# EAGLE board battery_board (EAGLE 6.4)
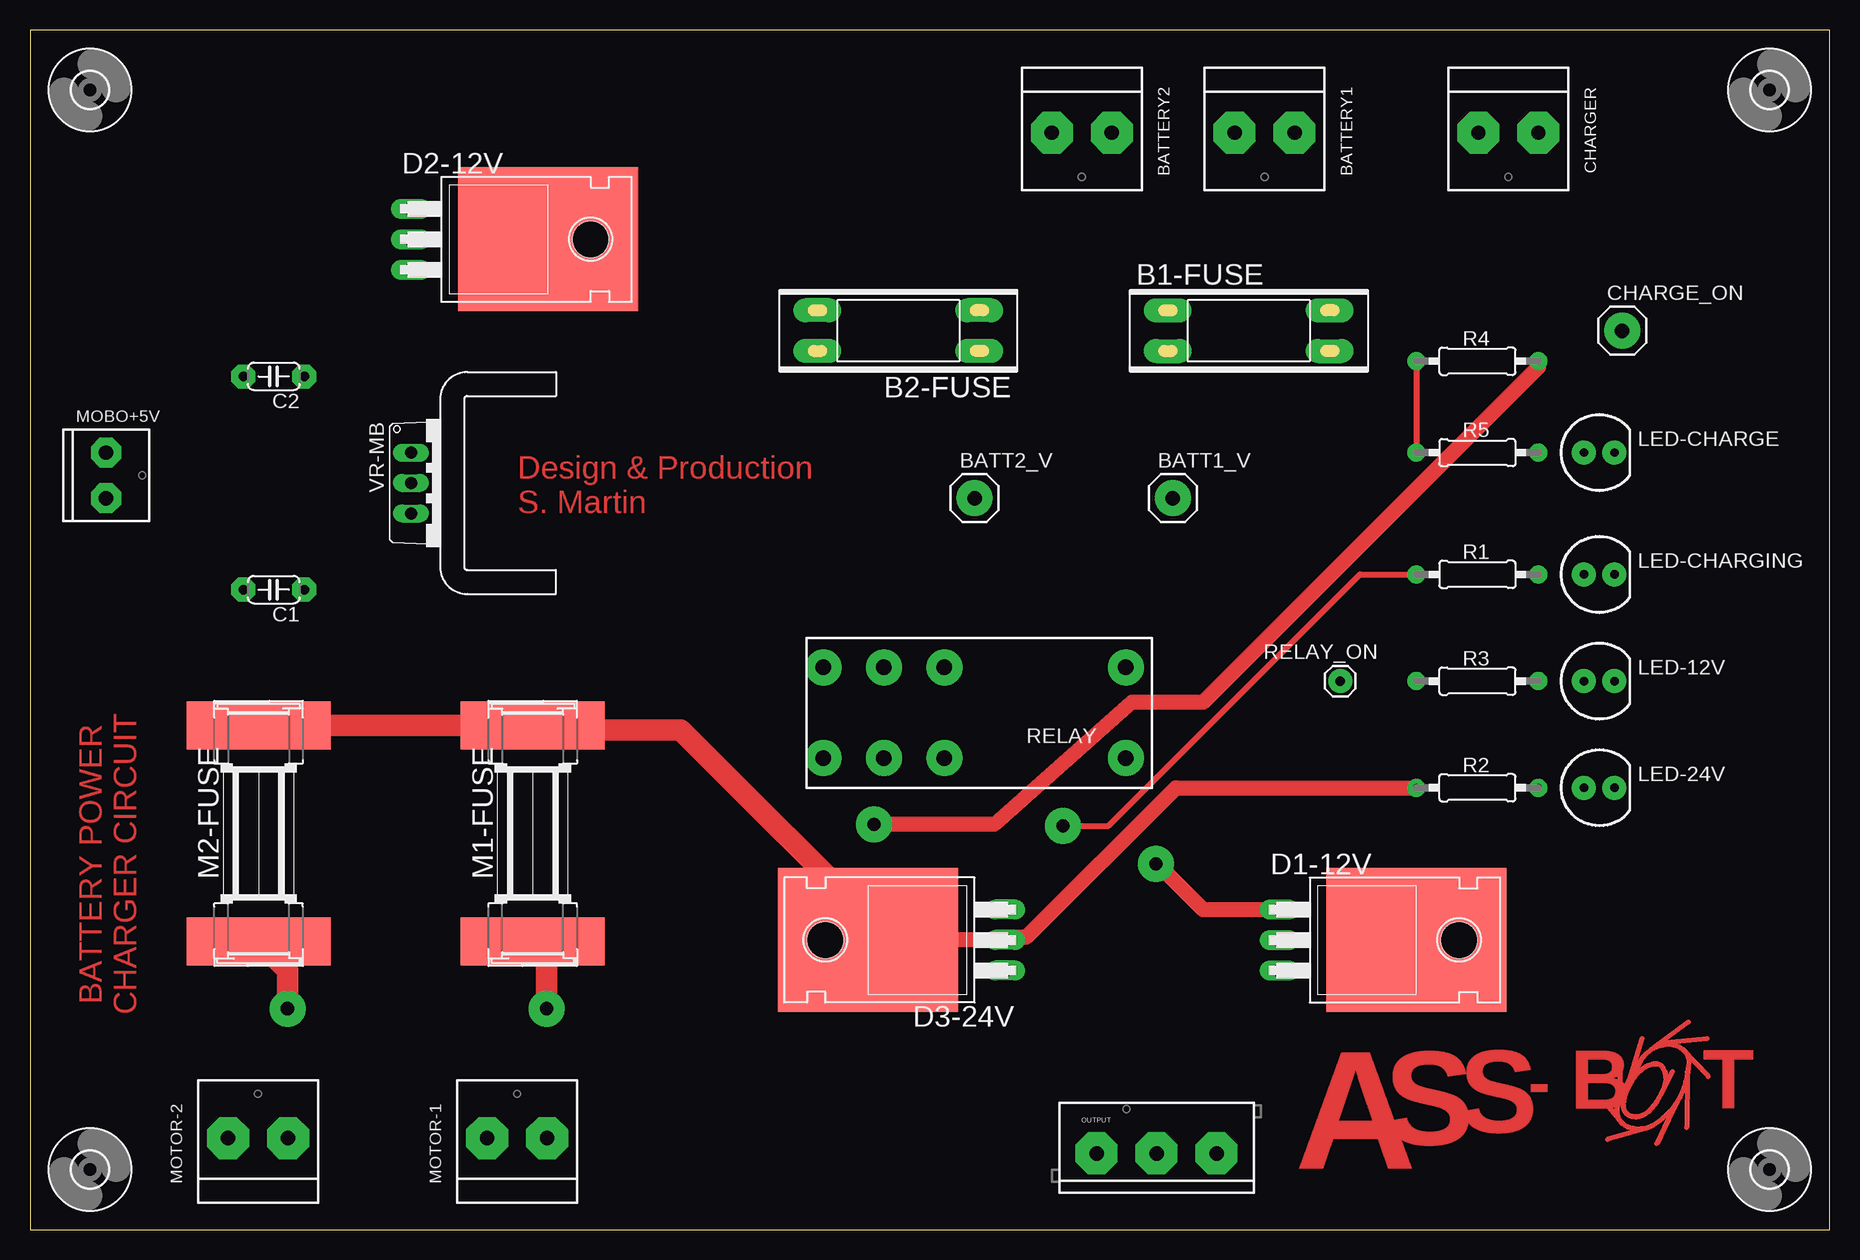
[diagram p0: board, top side]
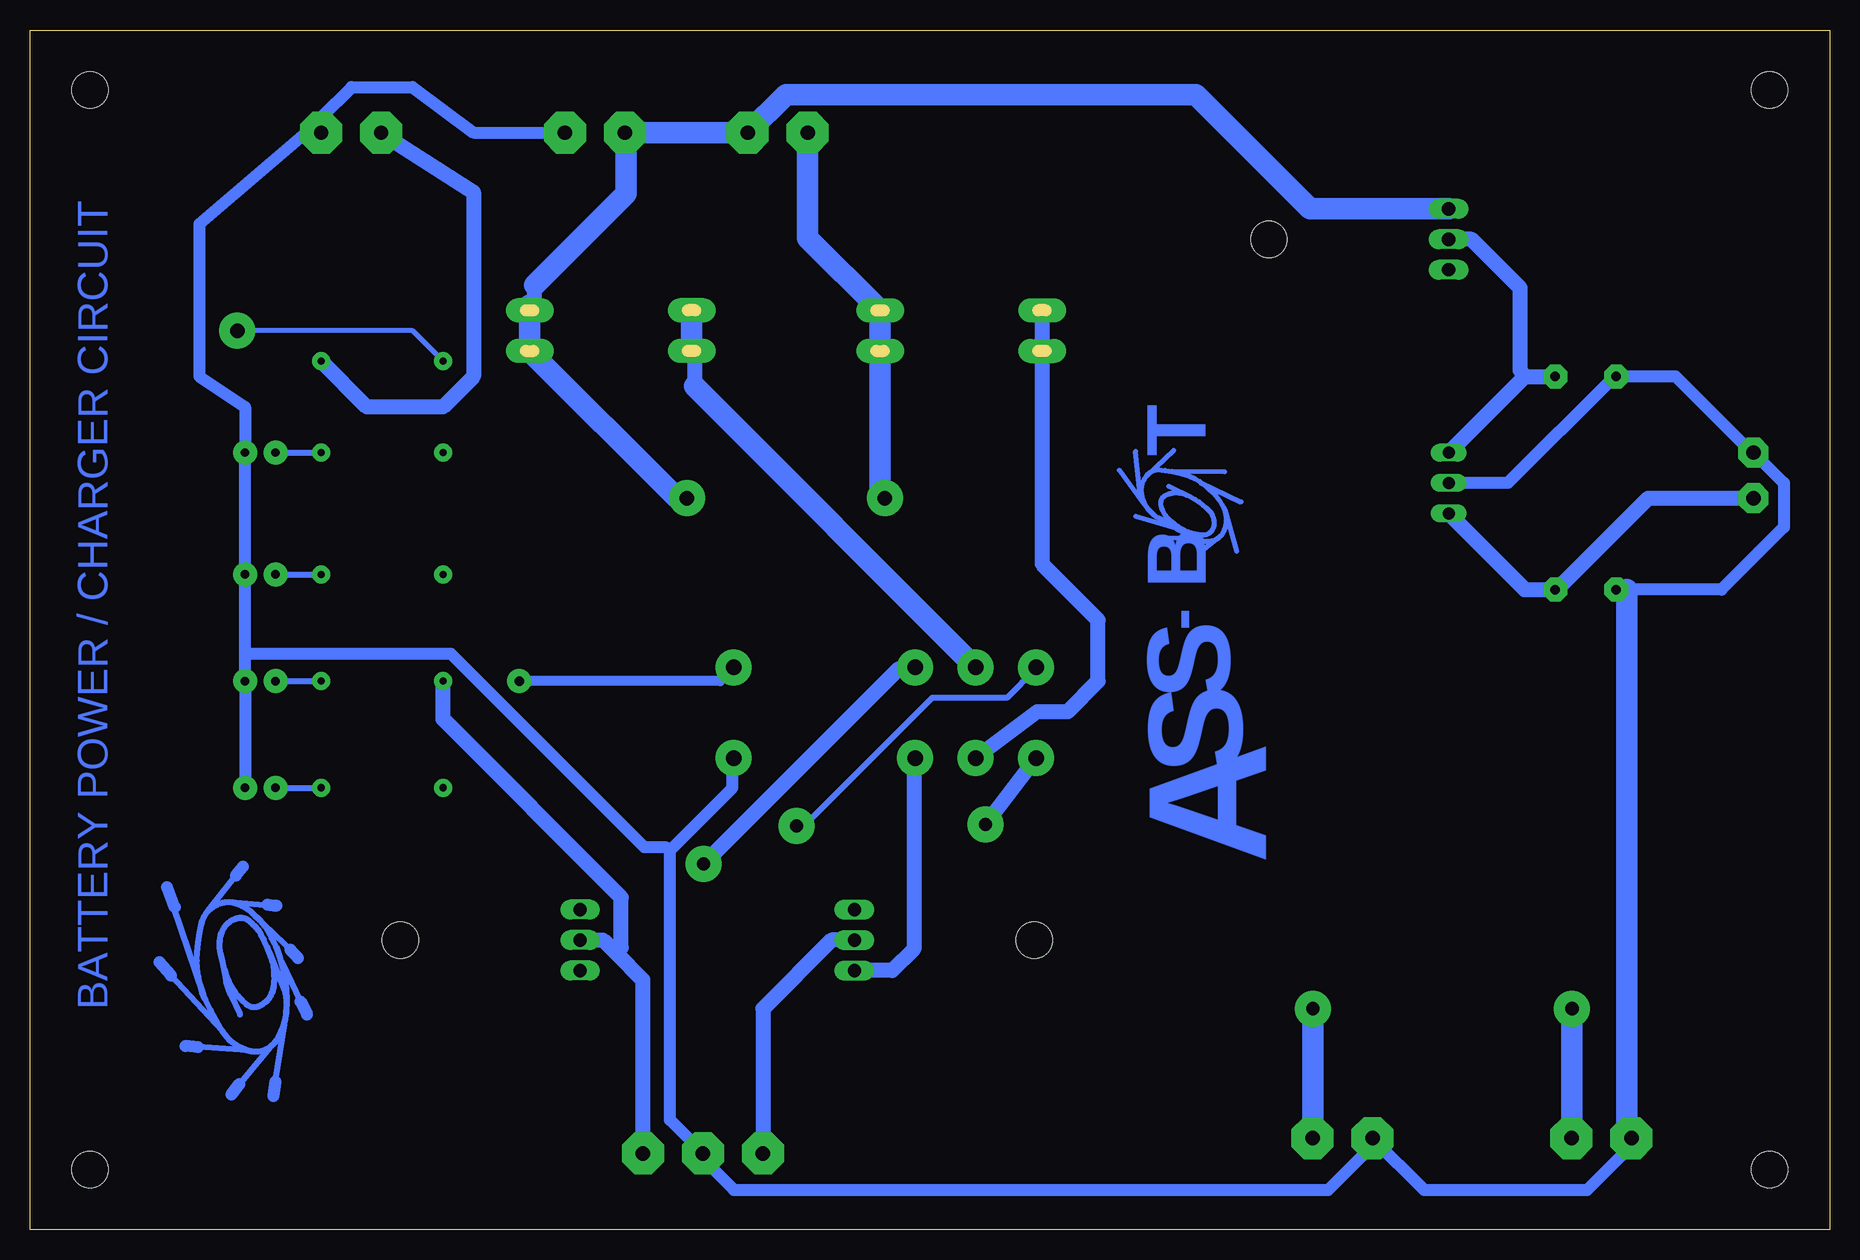
[diagram p1: board, bottom side, seen from below]

Size 150 x 100 mm. Coordinates in mm from the lower left corner, seen from the top.
Outline: 0,0 150,0 150,100 0,100 0,0
Copper layers (1*16): Top 0.035mm / dielectric 1.5mm / Bottom 0.035mm
Design rules "default *": minimum track width 20mil, minimum drill 0.8mm, track to track 20mil, track to pad 20mil, pad to pad 30mil, via to via 30mil, smd to smd 8mil, copper to edge 40mil, drill to drill 8mil, minimum pad ring 10mil, minimum via ring 20mil, stop-mask expansion 4mil, vias tented up to drill 0mil, thermal gap 10mil
Net classes: 1 ground: width 1.016 mm, clearance 0.762 mm; 2 battery: width 1.27 mm, clearance 0.762 mm
tRestrict: area 14.6,5.7 to 23.5,9.5; area 36.2,5.7 to 45.1,9.5; area 87,4.4 to 101,8.3; area 64.8,45.1 to 77.8,48.6; area 64.5,37.5 to 78.1,41; area 89.9,45.1 to 93.3,48.6; area 89.9,37.8 to 93,41; area 107.6,44.1 to 110.8,47.3; area 93.3,59.1 to 97.5,62.5; area 76.5,58.7 to 81,62.9; area 128.3,63.5 to 133.3,66; area 128.3,53.3 to 133.3,55.9; 16 more areas

## Footprints (pad centres in the part's own frame; a part is rotated, then mirrored left to right if it is on the bottom)
FUSE_BLADE = drill 0.8 pad 2 long: @P$1 -6.75,1.7; @P$2 6.75,1.7; P$1 -6.75,-1.7; P$2 6.75,-1.7
1-HOLE_BIG = drill 1.2 pad 3: P$1 0,0
SCREWTERMINAL-5MM-2 = drill 1.2 pad 3.5 octagon: 1 0,0; 2 5,0
C050-024X044 = drill 0.8 pad 2 octagon: 1 -2.54,0; 2 2.54,0
TO22-DIODE-H = drill 1.1 long: @P$1 2.54,-7.62; P$1 -2.54,-7.62; P$2 0,-7.62 | smd 12 x 15: @P$2 0,3.81 | hole 3: 0,7.366
LED5MM = drill 0.7 pad 2: A -1.27,0; K 1.27,0
FUSE-5X20MM_SMD = smd 4 x 12: P$1 -9,0; P$2 9,0
SCREWTERMINAL-3.81MM = drill 1.2 pad 2.5 octagon: 1 0,0; 2 3.81,0
SCREWTERMINAL-5MM-3 = drill 1.2 pad 3.5 octagon: 1 0,0; 2 5,0; 3 10,0
0207/10 = drill 0.6 pad 1.5: 1 -5.08,0; 2 5.08,0
RELAY_RT2 = drill 1.3 pad 3: 11 7.56,-3.68; 12 2.52,-3.68; 14 12.6,-3.68; 21 7.56,3.88; 22 2.52,3.88; 24 12.6,3.88; A1 -12.6,-3.68; A2 -12.6,3.88
1-HOLE = drill 0.8 pad 2: 1 0,0
3,0 = hole 3: 0,0
TO220V-HEATSINK = drill 1 long: 1 -2.54,-2.54; 2 0,-2.54; 3 2.54,-2.54

## Placement (x,y rotation side)
B1-FUSE  20A  [FUSE_BLADE]  101.6,74.93 0 top
B2-FUSE  20A  [FUSE_BLADE]  72.39,74.93 180 top
BATT1_V  1-HOLE  [1-HOLE_BIG]  95.25,60.96 0 top
BATT2_V  1-HOLE  [1-HOLE_BIG]  78.74,60.96 0 top
BATTERY1  12V  [SCREWTERMINAL-5MM-2]  105.41,91.44 180 top
BATTERY2  12V  [SCREWTERMINAL-5MM-2]  90.17,91.44 180 top
C1  10uF  [C050-024X044]  20.32,53.34 180 top
C2  2.2uF  [C050-024X044]  20.32,71.12 180 top
CHARGE_ON  1-HOLE  [1-HOLE_BIG]  132.72,74.93 0 top
CHARGER  24V  [SCREWTERMINAL-5MM-2]  125.73,91.44 180 top
D1-12V  30A  [TO22-DIODE-H]  111.76,24.13 270 top
D2-12V  30A  [TO22-DIODE-H]  39.37,82.55 270 top
D3-24V  30A  [TO22-DIODE-H]  73.66,24.13 90 top
LED-12V  [LED5MM]  130.81,45.72 0 top
LED-24V  [LED5MM]  130.81,36.83 0 top
LED-CHARGE  [LED5MM]  130.81,64.77 0 top
LED-CHARGING  [LED5MM]  130.81,54.61 0 top
M1-FUSE  3A  [FUSE-5X20MM_SMD]  41.91,33.02 90 top
M2-FUSE  3A  [FUSE-5X20MM_SMD]  19.05,33.02 90 top
MOBO+5V  2-HOLESSC3.81MM  [SCREWTERMINAL-3.81MM]  6.35,64.77 270 top
MOTOR-1  2-HOLESSC5MM  [SCREWTERMINAL-5MM-2]  38.1,7.62 0 top
MOTOR-2  2-HOLESSC5MM  [SCREWTERMINAL-5MM-2]  16.51,7.62 0 top
OUTPUT  3-HOLE  [SCREWTERMINAL-5MM-3]  88.9,6.35 0 top
R1  560R  [0207/10]  120.65,54.61 180 top
R2  1k  [0207/10]  120.65,36.83 0 top
R3  560R  [0207/10]  120.65,45.72 0 top
R4  1k  [0207/10]  120.65,72.39 0 top
R5  220R  [0207/10]  120.65,64.77 180 top
RELAY  5V  [RELAY_RT2]  78.74,43.18 180 top
RELAY_ON  1-HOLE"  [1-HOLE]  109.22,45.72 0 top
U$1  [LOGO-ASSBOT]  105.41,5.08 0 top
U$3  [3,0]  5,95 0 top
U$4  [3,0]  145,95 0 top
U$5  [3,0]  145,5 0 top
U$6  [3,0]  5,5 0 top
U$7  [LOGO-ASSBOT]  46.99,30.48 90 bottom
U$8  [LOGO-SYNCHROTRON]  132.08,21.59 270 bottom
U$9  [LOGO-SYNCHROTRON-SILK]  14.61,84.45 0 top
VR-MB  LT323A  [TO220V-HEATSINK]  34.29,62.23 270 top

## Library data of the parts
B1-FUSE B2-FUSE BATT1_V BATT2_V BATTERY1 BATTERY2 C1 C2 CHARGE_ON CHARGER D1-12V D2-12V D3-24V LED-12V LED-24V LED-CHARGE LED-CHARGING M1-FUSE M2-FUSE MOBO+5V MOTOR-1 MOTOR-2 OUTPUT R1-R5 RELAY_ON U$1 U$3-U$9 VR-MB = parts
RELAY = parts; MPN: RT424A05; OC_FARNELL: unknown; OC_NEWARK: 48M7975

## Nets
12V [battery]: D1-12V.P$2 OUTPUT.3 R3.1
24V [battery]: D3-24V.P$2 M1-FUSE.P$2 M2-FUSE.P$2 OUTPUT.1 R2.1
GND [ground]: BATTERY1.1 C1.2 C2.2 CHARGER.1 LED-12V.K LED-24V.K LED-CHARGE.K LED-CHARGING.K MOBO+5V.1 MOTOR-1.1 MOTOR-2.1 OUTPUT.2 RELAY.A2 VR-MB.2
N$1 [battery]: B1-FUSE.P$2 BATT1_V.P$1 BATTERY1.2 BATTERY2.1 D2-12V.P$1
N$2 [battery]: CHARGER.2 R4.2 RELAY.24
N$3: LED-24V.A R2.2
N$4 [battery]: D3-24V.P$1 RELAY.22
N$5 [battery]: B2-FUSE.P$1 BATT2_V.P$1 BATTERY2.2
N$6 [battery]: D1-12V.P$1 RELAY.12
N$7: LED-CHARGING.A R1.1
N$8 [battery]: C1.1 MOBO+5V.2 VR-MB.3
N$9 [battery]: M1-FUSE.P$1 MOTOR-1.2
N$10 [battery]: M2-FUSE.P$1 MOTOR-2.2
N$11: RELAY.A1 RELAY_ON.1
N$12 [battery]: C2.1 D2-12V.P$2 VR-MB.1
N$13: R1.2 RELAY.14
N$14: LED-12V.A R3.2
N$15: CHARGE_ON.P$1 R4.1 R5.2
N$16: LED-CHARGE.A R5.1
N$20 [battery]: B2-FUSE.P$2 RELAY.21
N$39 [battery]: B1-FUSE.P$1 RELAY.11

## Tracks (layer width: path | path; a pad name or v marks a point on that pad's centre or on a via)
12V
  Bottom 1.27: 101.16,23.05 102.23,24.13 D1-12V.P$2 | 101.16,23.05 98.93,20.83 98.93,6.35 OUTPUT.3 | R3.1 115.57,42.55 100.71,27.69 100.71,23.5 101.16,23.05
24V
  Top 1.27: 19.05,42.04 M2-FUSE.P$2 | 41.91,42.04 M1-FUSE.P$2 42.42,41.66 | 71.75,24.13 D3-24V.P$2 81.79,24.38 83.06,24.38 95.5,36.83 R2.1
  Top 1.778: 41.91,42.04 19.05,42.04 | 42.42,41.66 54.23,41.66 71.75,24.13
  Bottom 1.27: OUTPUT.1 88.9,18.41 83.19,24.13 D3-24V.P$2
GND
  Bottom 1.016: C1.2 16.89,53.34 9.02,53.34 3.81,58.55 3.81,62.23 MOBO+5V.1 6.73,65.02 12.83,71.12 C2.2 18.16,70.87 26.8,62.23 VR-MB.2 | 16.89,8 MOTOR-2.1 17.14,6.35 20.19,3.3 33.78,3.3 MOTOR-1.1 38.48,7.37 38.99,6.1 41.78,3.3 91.31,3.3 93.47,5.46 OUTPUT.2 94.23,6.73 96.65,9.14 96.65,31.62 | 96.65,31.62 91.44,36.83 91.44,39.24 RELAY.A2 | LED-24V.K LED-12V.K 132.08,48.01 | 132.08,48.01 LED-CHARGING.K LED-CHARGE.K 132.08,68.58 135.89,71.12 135.89,83.82 127,91.44 CHARGER.1 125.73,92.71 123.19,95.25 118.11,95.25 113.03,91.44 BATTERY1.1 | 132.08,48.01 114.94,48.01 98.81,31.88 97.03,31.88 96.65,31.62
  Bottom 1.778: 16.89,53.34 16.89,8
N$1
  Bottom 1.016: BATT1_V.P$1 96.08,60.96 | 100.33,91.36 BATTERY1.2
  Bottom 1.27: 108.35,77.07 107.95,77.47 107.95,78.74
  Bottom 1.778: D2-12V.P$1 43.31,85.09 52.83,94.61 87,94.61 BATTERY2.1 BATTERY1.2 | 96.08,60.96 B1-FUSE.P$2 108.35,77.07 | 107.95,78.74 100.33,86.36 100.33,91.36
N$2  (via drill 1.1 pad 3)
  Top 1.27: v70.36,33.78 80.39,33.78 91.82,43.94 97.79,43.94 125.73,71.88 R4.2
  Bottom 1.27: R4.2 121.92,68.58 115.57,68.58 113.03,71.12 113.03,86.49 120.78,91.44 CHARGER.2 | v70.36,33.78 66.17,39.24 RELAY.24
N$3
  Bottom 0.508: LED-24V.A R2.2
N$4
  Bottom 1.27: D3-24V.P$1 78.11,21.59 76.33,23.37 76.33,39.24 RELAY.22
N$5
  Bottom 1.27: 79.14,61.83 BATT2_V.P$1
  Bottom 1.778: BATTERY2.2 85.17,82.66 B2-FUSE.P$1 79.14,61.83
N$6  (via drill 1.1 pad 3)
  Top 1.27: v93.85,30.48 93.98,30.48 97.79,26.67 D1-12V.P$1
  Bottom 1.27: v93.85,30.48 77.6,46.74 RELAY.12
N$7
  Bottom 0.508: LED-CHARGING.A R1.1
N$8
  Bottom 1.27: VR-MB.3 25.4,53.34 C1.1 22.35,53.72 15.11,60.96 MOBO+5V.2
N$9  (via drill 1.1 pad 3)
  Top 1.27: 43.05,22.86 41.91,24 M1-FUSE.P$1
  Top 1.778: 43.05,22.86 v43.05,18.41
  Bottom 1.27: 43.05,7.62 MOTOR-1.2
  Bottom 1.778: v43.05,18.41 43.05,7.62
N$10  (via drill 1.1 pad 3)
  Top 1.27: 19.05,24 M2-FUSE.P$1
  Top 1.778: v21.46,18.41 21.46,21.59 19.05,24
  Bottom 1.27: 21.46,7.62 MOTOR-2.2
  Bottom 1.778: v21.46,18.41 21.46,7.62
N$11
  Bottom 0.508: 92.46,45.72 91.44,46.74 RELAY.A1
  Bottom 0.813: 92.46,45.72 RELAY_ON.1
N$12
  Bottom 1.27: 25.4,71.12 C2.1 | VR-MB.1 25.4,71.12 | D2-12V.P$2 29.84,82.55 25.78,78.49 25.78,71.63 25.4,71.12
N$13  (via drill 1.1 pad 3)
  Top 0.508: R1.2 110.87,54.61 89.92,33.66 v86.11,33.66
  Bottom 0.508: v86.11,33.66 85.47,33.66 74.8,44.32 68.58,44.32 66.17,46.74 RELAY.14
N$14
  Bottom 0.508: LED-12V.A R3.2
N$15
  Top 0.508: R4.1 R5.2
  Bottom 0.406: R4.1 118.11,74.93 CHARGE_ON.P$1
N$16
  Bottom 0.508: LED-CHARGE.A R5.1
N$20
  Bottom 1.27: B2-FUSE.P$2 65.64,55.48 60.96,50.8 60.96,45.72 63.5,43.18 66.03,43.18 RELAY.21
N$39
  Bottom 1.016: 94.85,76.6 94.61,76.83
  Bottom 1.27: 94.61,76.83 94.61,70.3
  Bottom 1.778: B1-FUSE.P$1 94.85,76.6 | 94.61,70.3 RELAY.11

## Text on the board
Top: Design & Production / S. Martin | BATTERY POWER / CHARGER CIRCUIT
Bottom: BATTERY POWER / CHARGER CIRCUIT
_tplace: B1 | B2 | Vin | GND | Vin | GND | Vin | GND | CHARGE ON | MOBO | B2 FUSE | B1 FUSE | GND | CHARGE / CONNECTED | 5V | BATTERY 2 / VOLTAGE | BATTERY 1 / VOLTAGE | CHARGING | RELAY ON | 12V ON | 24V ON | M2 FUSE | M1 FUSE | GND | GND | 24V | GND | 12V | 24V | 24V | DRIVE MOTORS | OUTPUT